# Altium PCB JTAG ICE.PcbDoc
Units mm, origin at the board's own origin, x right, y up, seen from the top; angles counter-clockwise.
Board outline 133 x 101 mm, 2 copper layers (Top Layer, Bottom Layer); 48 components, 49 nets, 240 pads, 22 vias.
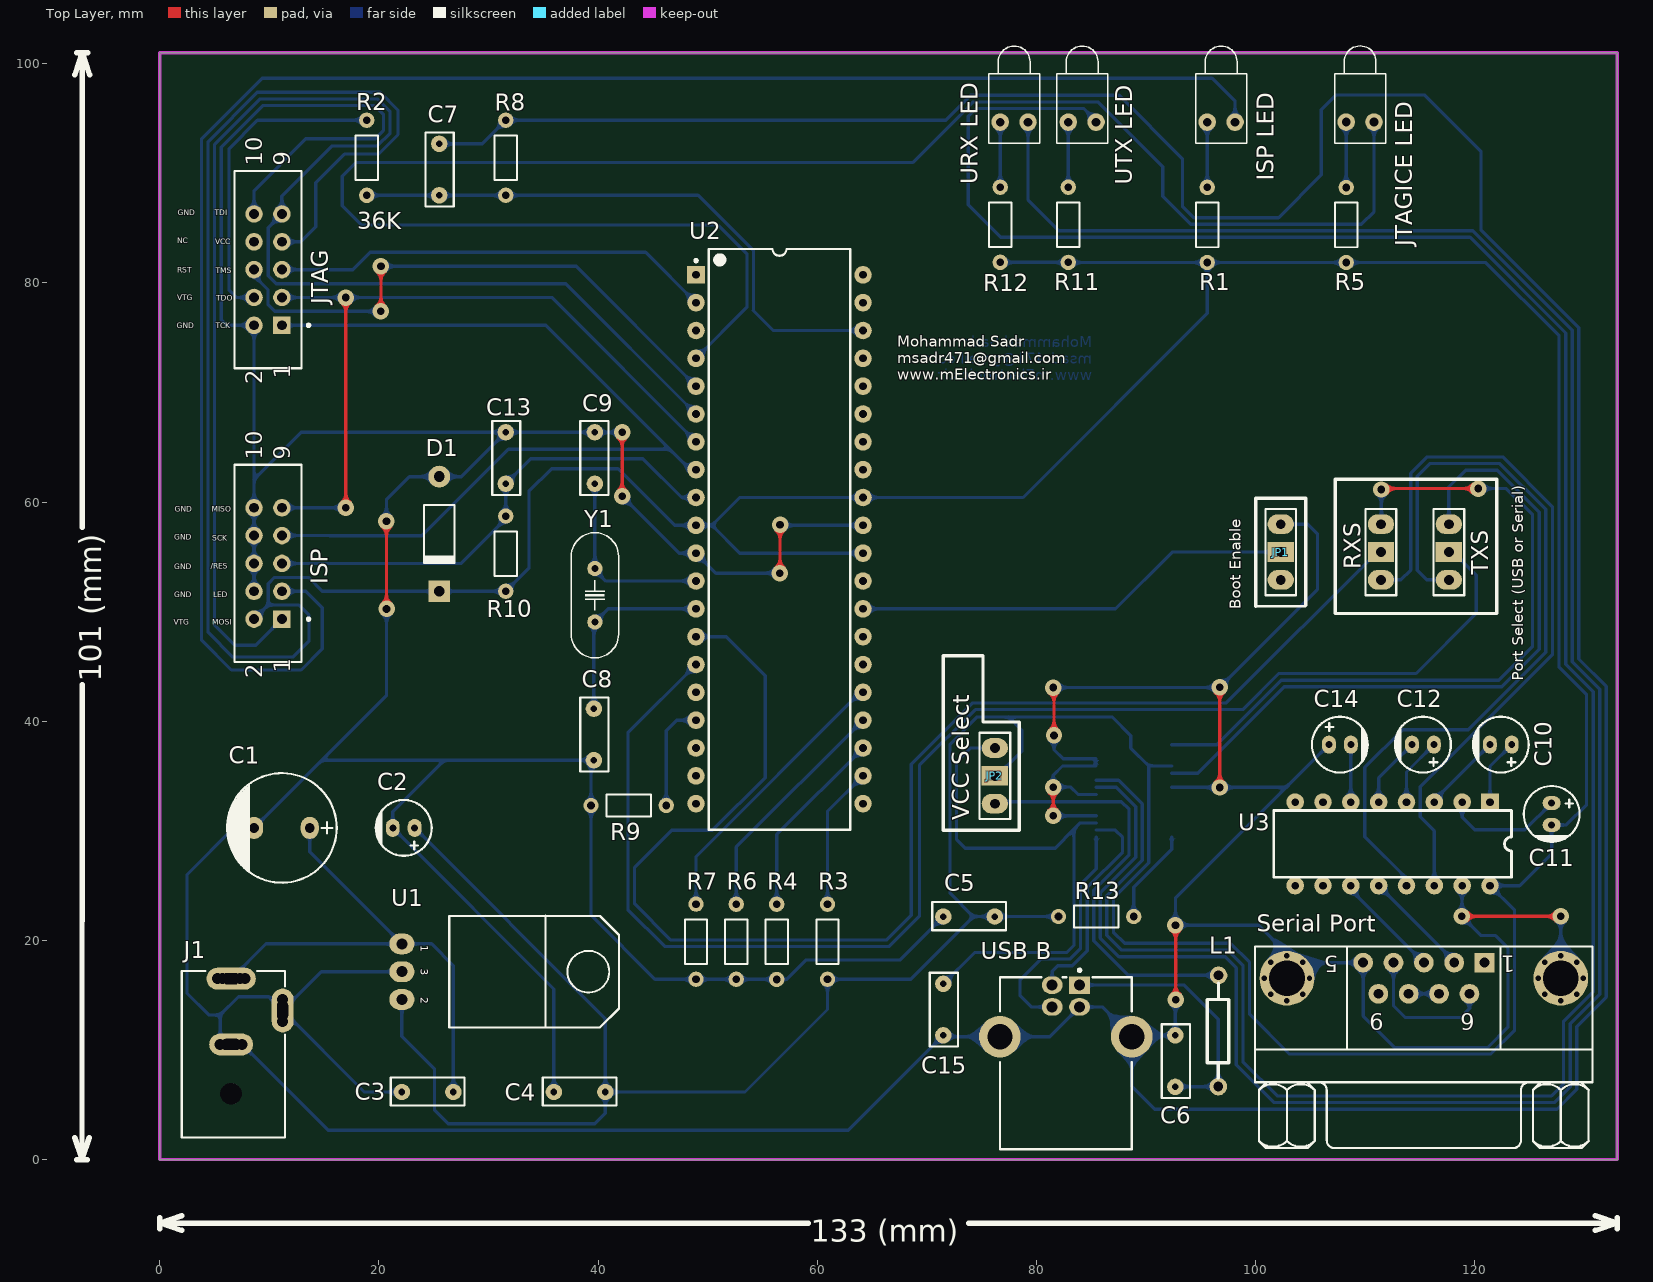
[diagram p0: Top Layer view]
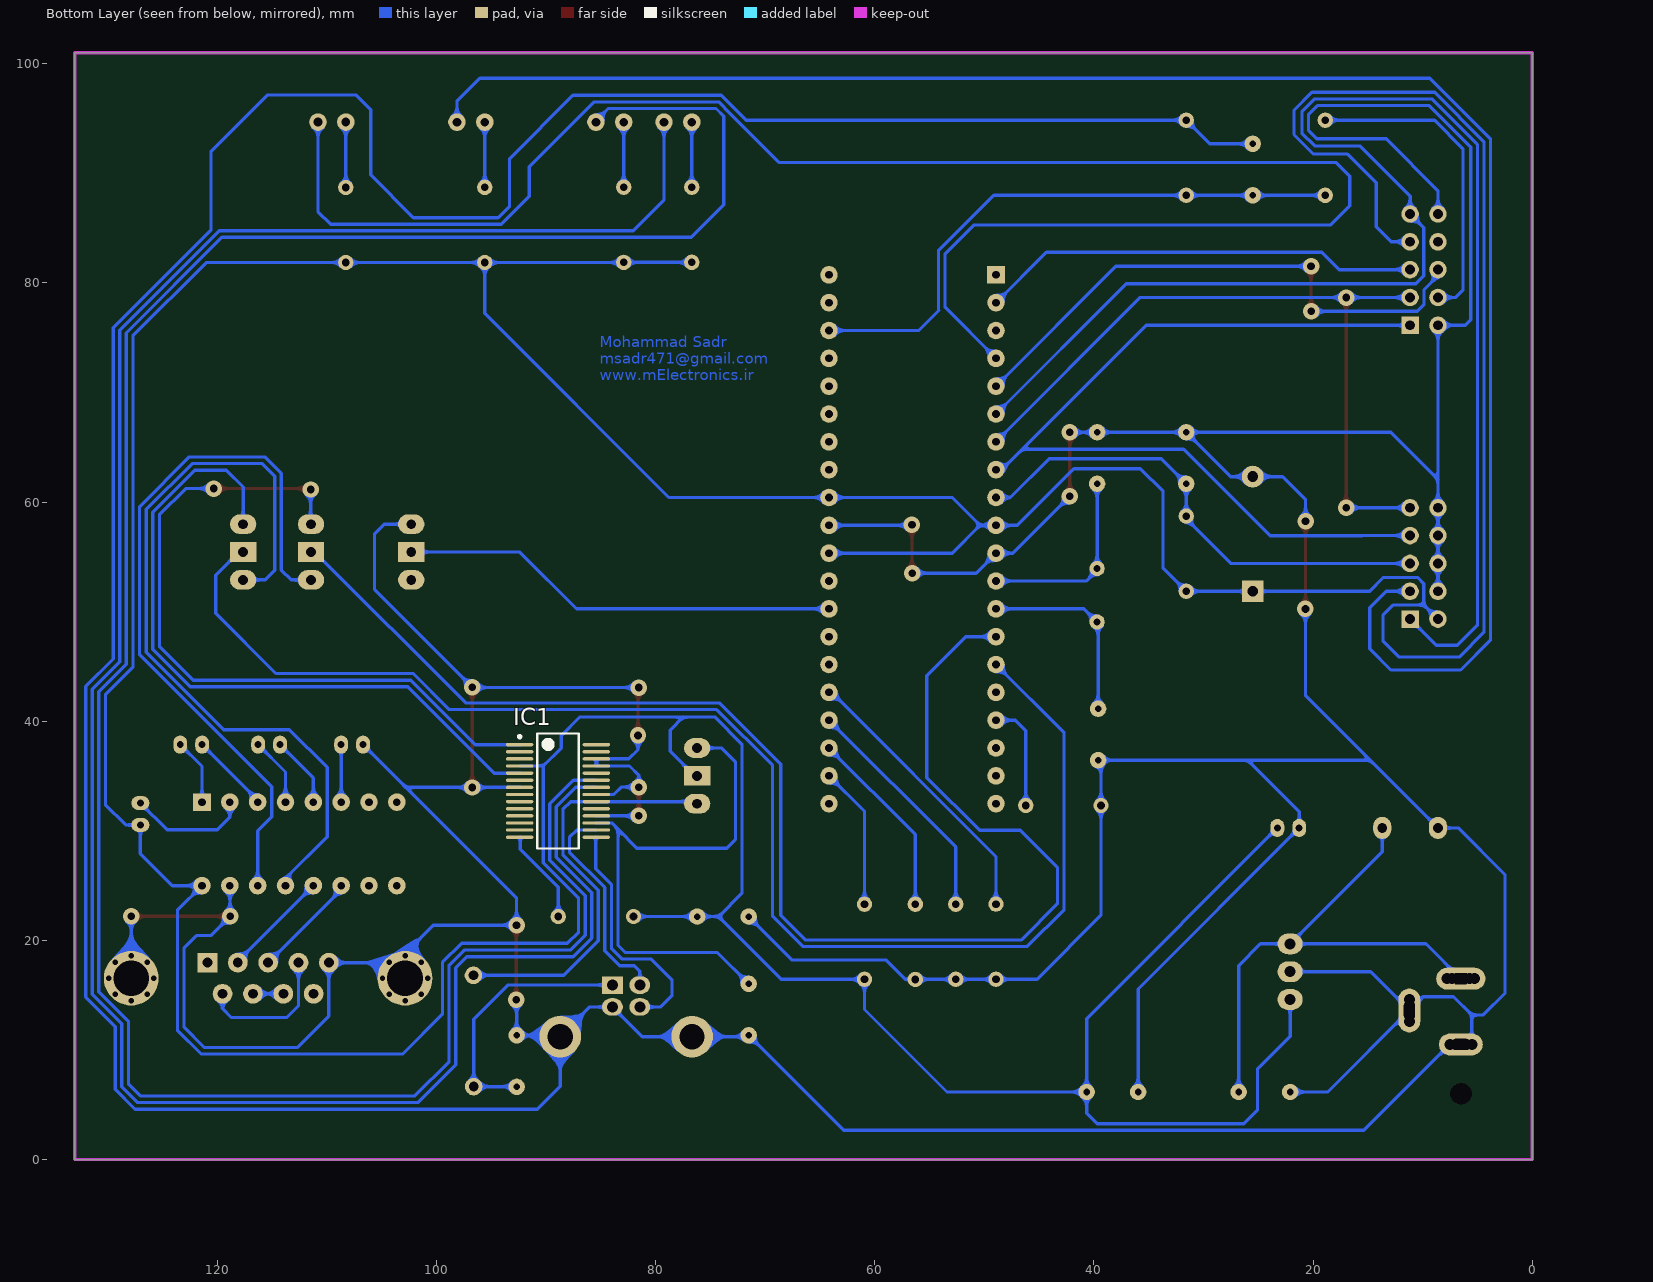
[diagram p1: Bottom Layer view, seen from below]
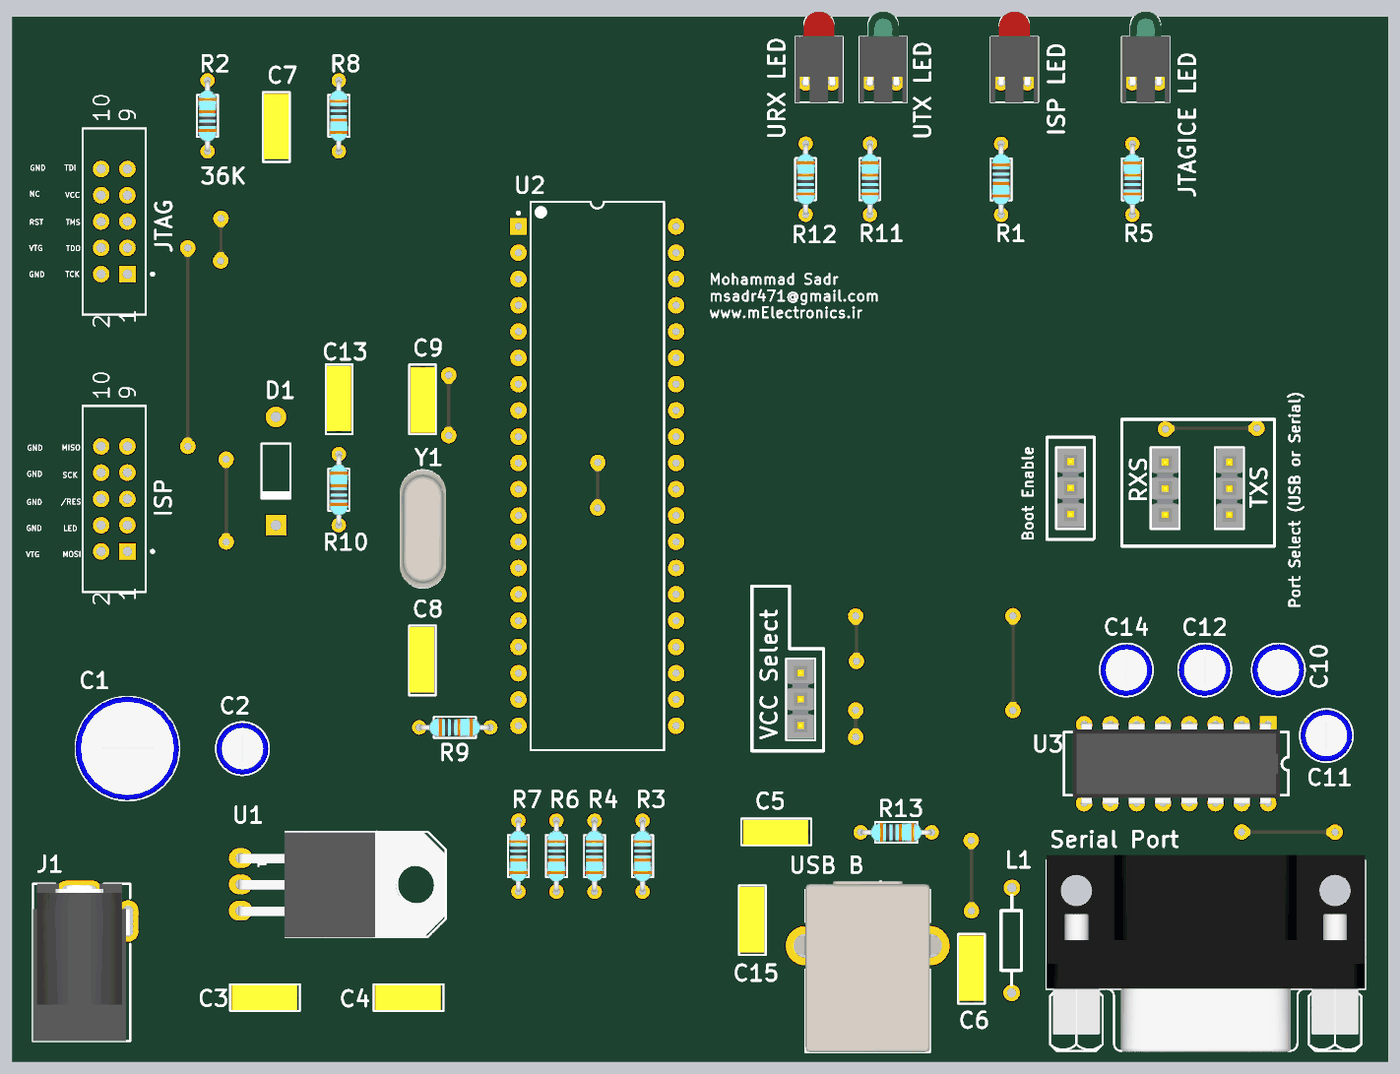
[diagram p2: 3D render of the assembled board from above, using the file's embedded part models]

## Layer stack, top to bottom
Top Solder: solder mask 0.0102, Solder Resist, Dk 3.5
Top Layer: signal copper 0.0356
Dielectric 1: dielectric 0.32, FR-4, Dk 4.8
Bottom Layer: signal copper 0.0356
Bottom Solder: solder mask 0.0102, Solder Resist, Dk 3.5

## Board outline
0,0 0,101 133,101 133,0

## Design rules (kind name [scope] priority, off if disabled: settings)
Clearance [All] p1: gap=0.3 ignorepadtopadclearanceinfootprint=FALSE
ComponentClearance [All] p1: gap=1 collisioncheckmode=3 verticalgap=1 showdistances=FALSE
Height [All] p1: minheight=0 maxheight=100 prefheight=12.7
HoleSize [All] p1: absolutevalues=TRUE maxlimit=5 minlimit=0.01 maxpercent=80.000 minpercent=20.000
HoleToHoleClearance [All] p1: gap=0 allowstackedmicrovias=TRUE
MinimumSolderMaskSliver [All] p1: minsoldermaskwidth=0.1
PlaneClearance [All] p1: clearance=0.5
PlaneConnect [All] p1: planeconnectstyle=Direct reliefexpansion=0.508 reliefentries=4 reliefconductorwidth=0.254 reliefairgap=0.254
PolygonConnect [All] p1: connectstyle=Relief reliefconductorwidth=0.3 reliefentries=4 polygonreliefangle="90 Angle" airgapwidth=0.3
RoutingTopology [All] p1: topology=Horizontal
RoutingVias [All] p1: holewidth=0.7 width=1.5 viastyle="Through Hole" minholewidth=0.7 minwidth=1.5 maxholewidth=0.7 maxwidth=1.5
SMDNeckDown [All] p1: percent=100.000
ShortCircuit [All] p1: allowed=TRUE
SilkToSilkClearance [All] p1: silktosilkclearance=0.1
SilkToSolderMaskClearance [IsPad] p1: minsilkscreentomaskgap=0 clearancetoexposedcopper=TRUE
SolderMaskExpansion [All] p1: expansion=0.1
UnRoutedNet [All] p1: checkbadconnections=TRUE
Width [All] p1: maxlimit=0.5 minlimit=0.3 preferedwidth=0.3 bottomlayer_maxwidth=0.4 minimp=50.000000 maximp=50.000000 favimp=50.000000 checkconnectedcopper=TRUE
18 further rules are at their usual default settings.

## Components (designator, comment, footprint, x,y, rotation, side; value= is the part's Value field where it differs from the comment)
C1 "1000uF" "cap 04" 11.14,30.26 r0 top
C2 "10uF" "cap 01" 22.26,30.26 r0 top
C3 "100nF" "Cap - 100nF - 2" 26.79,6.16 r180 top
C4 "100nF" "Cap - 100nF - 2" 40.66,6.16 r180 top
C5 "100nF" "Cap - 100nF - 2" 76.2,22.17 r180 top
C6 "100nF" "Cap - 100nF - 2" 92.67,6.63 r90 top
C7 "100nF" "Cap - 100nF - 2" 25.495,87.986 r90 top
C8 "22pF" "Cap - 100nF - 2" 39.61,36.44 r90 top
C9 "22pF" "Cap - 100nF - 2" 39.7,66.37 r270 top
C10 "10uF" "cap 01" 122.37,37.86 r0 top
C11 "10uF" "cap 01" 127.01,31.53 r90 top
C12 "10uF" "cap 01" 115.26,37.86 r0 top
C13 "100nF" "Cap - 100nF - 2" 31.57,61.67 r90 top
C14 "10uF" "cap 01" 107.683,37.86 r180 top
C15 "100nF" "Cap - 100nF - 2" 71.5,11.33 r90 top
D1 "Diode 1N4001" DO-41 25.5,57.085 r270 top
IC1 "FT232RL" SSOP-28_M 88.9,33.635 r180 bottom
ISP "IDC 2X5" 9181109621 9.87,54.395 r90 top
"ISP LED" "Red" LED-RED 96.85,94.66 r90 top
J1 "Power Jack" "Power Jack" 6.51,2 r90 top
JP1 "Boot Enable" "jumper selector" 102.293,52.895 r90 top
JP2 "VCC Select" "jumper selector" 76.2,32.47 r90 top
JTAG "IDC 2X5" 9181109621 9.87,81.205 r90 top
"JTAGICE LED" "Green" LED-GREEN 109.53,94.67 r90 top
L1 "Ferrite-bead" Ferrite-bead 96.59,6.65 r270 top
R1 "470R" Res-(1/4)#1 95.58,85.28 r270 top
R2 "36K" Res-(1/4)#2 18.88,91.414 r90 top
R3 "10K" Res-(1/4)#3 60.93,19.87 r270 top
R4 "10K" Res-(1/4)#4 56.29,19.87 r270 top
R5 "100R" Res-(1/4)#5 108.26,85.28 r90 top
R6 "10K" Res-(1/4)#6 52.6,19.87 r270 top
R7 "10K" Res-(1/4)#1 48.93,19.87 r270 top
R8 "150K" Res-(1/4)#7 31.57,91.415 r270 top
R9 "10K" Res-(1/4)#8 42.785,32.31 r0 top
R10 "10K" Res-(1/4)#9 31.569,55.281 r90 top
R11 "470R" Res-(1/4)#10 82.9,85.295 r90 top
R12 "470R" Res-(1/4)#11 76.69,85.295 r90 top
R13 "10K" Res-(1/4)#12 85.44,22.17 r0 top
RXS "RX Port Select" "jumper selector" 111.43,57.975 r270 top
"Serial Port" "DB9 Connector" "DB9 Female" 120.888,17.963 r180 top
TXS "TX Port Select" "jumper selector" 117.63,57.975 r270 top
U1 "L7805CV" "78XXCV - Right" 22.09,17.14 r270 top
U2 "ATmega16A-PU" 40P6 56.55,56.6 r0 top
U3 "MAX232" DIP16 112.493,28.8 r270 top
"URX LED" "Red" LED-RED 77.96,94.66 r90 top
"USB B" "USB Connector" USB2.5-2H4E 82.68,14.92 r270 top
"UTX LED" "Green" LED-GREEN 84.17,94.66 r90 top
Y1 "7.3728 MHz" "XTAL Small" 39.7,51.49 r90 top

## Footprints (in the part's own frame and the unit in brackets; to place one, negate y for a bottom-side part, rotate by r counter-clockwise, add the part's x,y. Pads: shape width x height; smd on the part's side, far side on the other; paste and mask are expansions set on the pad)
40P6 [mm] "DIP, 40-Leads, Row Spacing 15.24mm, Pitch 2.54mm, Body 52.2x13.95mm"
  rect 1.6x1.6 hole 0.7: 1(-7.62,24.13)
  round 1.6 hole 0.7: 2(-7.62,21.59) 3(-7.62,19.05) 4(-7.62,16.51) 5(-7.62,13.97) 6(-7.62,11.43) 7(-7.62,8.89) 8(-7.62,6.35) 9(-7.62,3.81) 10(-7.62,1.27) 11(-7.62,-1.27) 12(-7.62,-3.81) 13(-7.62,-6.35) 14(-7.62,-8.89) 15(-7.62,-11.43) 16(-7.62,-13.97) 17(-7.62,-16.51) 18(-7.62,-19.05) 19(-7.62,-21.59) 20(-7.62,-24.13) 21(7.62,-24.13) 22(7.62,-21.59) 23(7.62,-19.05) 24(7.62,-16.51) 25(7.62,-13.97) 26(7.62,-11.43) 27(7.62,-8.89) 28(7.62,-6.35) 29(7.62,-3.81) 30(7.62,-1.27) 31(7.62,1.27) 32(7.62,3.81) 33(7.62,6.35) 34(7.62,8.89) 35(7.62,11.43) 36(7.62,13.97) 37(7.62,16.51) 38(7.62,19.05) 39(7.62,21.59) 40(7.62,24.13)
  silkscreen extent -7.74,-26.5 6.45,26.5, body extent -7.05,-26.47 7.05,26.47, height 4.83
"78XXCV - Right" [mm] "Right Angle"
  oval 1.905x2.286 hole 1: 1(-2.54,0) 2(2.54,0) 3(0,0)
  silkscreen extent -5.11,4.32 5.08,19.81, body extent -5.03,-0.2 5.13,19.71, height 4.44
9181109621 [mm] "Connector; IDC, PCB Transition - 2 Rows, Thru-Hole; 10 Position; Vertical; Pitch 2.54 mm; Body 18.00 x 6.1 x 7.45 mm (LxWxH)"
  rect 1.6x1.6 hole 0.9: 1(-5.08,-1.27)
  round 1.6 hole 0.9: 2(-5.08,1.27) 3(-2.54,-1.27) 4(-2.54,1.27) 5(0,-1.27) 6(0,1.27) 7(2.54,-1.27) 8(2.54,1.27) 9(5.08,-1.27) 10(5.08,1.27)
  silkscreen extent -9,-3.83 9,3.05
"cap 01" [mm]
  oval 1.27x1.651 hole 0.635: 1(1,0) 2(-1,0)
  silkscreen extent -2.55,-2.55 2.55,2.55, body extent -2.53,-2.53 2.53,2.53, height 12.54
"cap 04" [mil]
  oval 65x80 hole 35: 1(100,0) 2(-100,0)
  silkscreen extent -197,-197 197,197, body extent -198,-197 198,199, height 513
"Cap - 100nF - 2" [mm]
  round 1.5 hole 0.6: 1(0,0) 2(4.7,0)
  silkscreen extent -1.02,-1.33 5.72,1.24, body extent -0.75,-1.2 5.55,1.2, height 6.84
"DB9 Female" [mm] "Connector; D Subminiature AMPLIMITE 2000; 9 Position; Right Angle"
  rect 1.8x1.8 hole 0.9: 1(0,0)
  round 1.8 hole 0.9: 2(2.77,0) 3(5.54,0) 4(8.31,0) 5(11.08,0) 6(1.385,2.84) 7(4.155,2.84) 8(6.925,2.84) 9(9.695,2.84)
  round 0.8 hole 0.5: 10(-9.015,1.42) 10(-8.412,-0.037) 10(-8.412,2.877) 10(-6.955,-0.64) 10(-6.955,3.48) 10(-5.498,-0.037) 10(-5.498,2.877) 10(-4.895,1.42) 11(15.975,1.42) 11(16.578,-0.037) 11(16.578,2.877) 11(18.035,-0.64) 11(18.035,3.48) 11(19.492,-0.037) 11(19.492,2.877) 11(20.095,1.42)
  round 5 hole 3.26: 10(-6.955,1.42) 11(18.035,1.42)
  silkscreen extent -9.86,-1.48 20.94,16.92, body extent -9.87,-2.03 20.95,17.04, height 12.71
DIP16 [mm]
  rect 1.6x1.6 hole 0.7: 1(-3.81,8.89)
  round 1.6 hole 0.7: 2(-3.81,6.35) 3(-3.81,3.81) 4(-3.81,1.27) 5(-3.81,-1.27) 6(-3.81,-3.81) 7(-3.81,-6.35) 8(-3.81,-8.89) 9(3.81,-8.89) 10(3.81,-6.35) 11(3.81,-3.81) 12(3.81,-1.27) 13(3.81,1.27) 14(3.81,3.81) 15(3.81,6.35) 16(3.81,8.89)
  silkscreen extent -3.05,-10.85 3.05,10.85, body extent -3.93,-10 3.94,10, height 5.08
DO-41 [mm] "Diode, Axial; Body 5.2 x 2.7 mm (LxDia. max), Lead Dia. 0.86 mm (max)"
  round 2 hole 1: 1(-5.23,0)
  rect 2x2 hole 1: 2(5.23,0)
  silkscreen extent -2.65,-1.4 2.75,1.4
Ferrite-bead [mm]
  round 1.6 hole 0.9: 1(0,0) 2(-10.16,0.025)
  silkscreen extent -9.45,-1.02 -0.79,0.96
"jumper selector" [mm]
  oval 1.8x2.4 hole 0.9: 1(0,0) 3(5.08,0)
  rect 1.8x2.4 hole 0.9: 2(2.54,0)
  silkscreen extent -1.4,-1.4 6.48,1.4, body extent -1.24,-1.27 6.38,1.27, height 10.16
LED-GREEN [mm] "LED 3mm Right Angle - Color Green"
  round 1.6 hole 0.8: 1(0,1.27) 2(0,-1.27)
  silkscreen extent -1.93,-2.32 6.95,2.3, body extent -1.93,-2.32 6.83,2.3, height 7.31
LED-RED [mm] "LED 3mm Right Angle - Color Red"
  round 1.6 hole 0.8: 1(0,1.27) 2(0,-1.27)
  silkscreen extent -1.93,-2.32 6.95,2.3, body extent -1.93,-2.32 6.83,2.3, height 7.31
"Power Jack" [mm] "Power Adaptor Jack"
  round 1.5 hole 1: 1(14.5,-1.25) 1(14.5,-0.8) 1(14.5,-0.4) 1(14.5,0.4) 1(14.5,0.8) 1(14.5,1.25) 2(8.5,-1) 2(8.5,1) 2(8.5,-0.5) 2(8.5,0.5) 3(10.6,-4.7) 3(11.1,-4.7) 3(12.1,-4.7) 3(12.6,-4.7)
  oval 2x4.5 hole 1 square: 1(14.5,0)
  oval 2x4 hole 1 square: 2(8.5,0)
  oval 4x2 hole 1 square: 3(11.6,-4.7)
  round 1.9 hole 2: MH(4,0)
  silkscreen extent 0,-4.9 15.2,4.5, body extent 0,-4.9 15.2,4.5, height 11
Res-(1/4)#1 [mm]
  round 1.4 hole 0.7: 1(-3.433,0) 2(3.424,0)
  silkscreen extent -2.03,-1.02 2.03,1.02, body extent -3.43,-0.93 3.43,0.91, height 2.92
Res-(1/4)#2 [mm]
  round 1.4 hole 0.7: 1(-3.43,-0.007) 2(3.429,0.002)
  silkscreen extent -2.03,-1.02 2.03,1.02, body extent -3.43,-0.93 3.43,0.91, height 2.92
Res-(1/4)#3 [mm]
  round 1.4 hole 0.7: 1(-3.425,0) 2(3.425,0)
  silkscreen extent -2.03,-1.02 2.03,1.02, body extent -3.43,-0.93 3.43,0.91, height 2.92
Res-(1/4)#4 [mm]
  round 1.4 hole 0.7: 1(-3.425,-0.002) 2(3.436,-0.002)
  silkscreen extent -2.03,-1.02 2.03,1.02, body extent -3.43,-0.93 3.43,0.91, height 2.92
Res-(1/4)#5 [mm]
  round 1.4 hole 0.7: 1(-3.427,0) 2(3.426,0)
  silkscreen extent -2.03,-1.02 2.03,1.02, body extent -3.43,-0.93 3.43,0.91, height 2.92
Res-(1/4)#6 [mm]
  round 1.4 hole 0.7: 1(-3.431,0) 2(3.426,0)
  silkscreen extent -2.03,-1.02 2.03,1.02, body extent -3.43,-0.93 3.43,0.91, height 2.92
Res-(1/4)#7 [mm]
  round 1.4 hole 0.7: 1(-3.428,0) 2(3.429,0)
  silkscreen extent -2.03,-1.02 2.03,1.02, body extent -3.43,-0.93 3.43,0.91, height 2.92
Res-(1/4)#8 [mm]
  round 1.4 hole 0.7: 1(-3.435,0.001) 2(3.424,0.003)
  silkscreen extent -2.03,-1.02 2.03,1.02, body extent -3.43,-0.93 3.43,0.91, height 2.92
Res-(1/4)#9 [mm]
  round 1.4 hole 0.7: 1(-3.426,0.003) 2(3.434,-0.001)
  silkscreen extent -2.03,-1.02 2.03,1.02, body extent -3.43,-0.93 3.43,0.91, height 2.92
Res-(1/4)#10 [mm]
  round 1.4 hole 0.7: 1(-3.429,0.001) 2(3.437,0)
  silkscreen extent -2.03,-1.02 2.03,1.02, body extent -3.43,-0.93 3.43,0.91, height 2.92
Res-(1/4)#11 [mm]
  round 1.4 hole 0.7: 1(-3.425,0) 2(3.435,0.001)
  silkscreen extent -2.03,-1.02 2.03,1.02, body extent -3.43,-0.93 3.43,0.91, height 2.92
Res-(1/4)#12 [mm]
  round 1.4 hole 0.7: 1(-3.435,0) 2(3.428,0.001)
  silkscreen extent -2.03,-1.02 2.03,1.02, body extent -3.43,-0.93 3.43,0.91, height 2.92
SSOP-28_M [mm] "SOP, 28-Leads, Body 10.2x5.3mm, Pitch 0.65mm, IPC Low Density"
  oval 2.5x0.3 smd: 1(-3.5,4.225) 2(-3.5,3.575) 3(-3.5,2.925) 4(-3.5,2.275) 5(-3.5,1.625) 6(-3.5,0.975) 7(-3.5,0.325) 8(-3.5,-0.325) 9(-3.5,-0.975) 10(-3.5,-1.625) 11(-3.5,-2.275) 12(-3.5,-2.925) 13(-3.5,-3.575) 14(-3.5,-4.225) 15(3.5,-4.225) 16(3.5,-3.575) 17(3.5,-2.925) 18(3.5,-2.275) 19(3.5,-1.625) 20(3.5,-0.975) 21(3.5,-0.325) 22(3.5,0.325) 23(3.5,0.975) 24(3.5,1.625) 25(3.5,2.275) 26(3.5,2.925) 27(3.5,3.575) 28(3.5,4.225)
  silkscreen extent -3.63,-5.25 1.9,5.25, body extent -3.88,-5.17 3.88,5.16, height 2.16
USB2.5-2H4E [mm] "Connector; USB1.1, Type B, Thru-Hole; 4 Position; Right Angle"
  rect 1.6x1.9 hole 1: 1(-1,1.25)
  oval 1.6x1.9 hole 1: 2(-1,-1.25) 3(1,-1.25) 4(1,1.25)
  round 3.8 hole 2.3: 5(3.71,6.02) 6(3.71,-6.02)
  silkscreen extent -2.47,-6.02 13.99,6.02, body extent -2.5,-7.45 14,7.45, height 10.95
"XTAL Small" [mil]
  round 55 hole 25: 1(-96.06,0) 2(96.06,0)
  silkscreen extent -225,-85 225,85, body extent -226,-89 226,89, height 140

## Part data
C1: library part Cap-Polar, "Polar Capacitor", Voltage=25V, Adding Date=1387/12/20, Designer="Saeid Jorablo", Organazation=ControTec
C2 C10 C11 C12 C14: library part Cap-Polar, "Polar Capacitor", Voltage=16V, Adding Date=1387/12/20, Designer="Saeid Jorablo", Organazation=ControTec
C3 C4 C5 C6 C7 C8 C9 C13 C15: library part Cap-Bipolar, "Bipolar Capacitor", Voltage=100V, Adding Date=1387/12/20, Designer="Saeid Jorablo", Organazation=ControTec
D1: "1 Amp General Purpose Rectifier", Code_JEDEC=DO-204-AL, ComponentLink1Description="Manufacturer Link", ComponentLink1URL=http://www.fairchildsemi.com/, ComponentLink2Description=Datasheet, ComponentLink2URL=http://www.fairchildsemi.com/ds/1N%2F1N4001.pdf, DatasheetVersion=1998, LatestRevisionDate=17-Jul-2002, LatestRevisionNote="Re-released for DXP Platform.", PackageDescription="Diode, Axial; Body 5.2 x 2.7 mm (LxDia. max), Lead Dia. 0.86 mm (max)", PackageReference=DO-41, PackageVersion=Aug-1999, Published=8-Jun-2000, Publisher="Altium Limited"
IC1: "USB UART Asynchronous Serial Data Transfer Chip, SSOP-28, Tape and Reel", ComponentLink1Description="Manufacturer Link", ComponentLink1URL=http://www.ftdichip.com/Products/ICs/FT232R.htm, ComponentLink2Description=Datasheet, ComponentLink2URL=http://www.ftdichip.com/Support/Documents/DataSheets/ICs/DS_FT232R.pdf, DatasheetVersion="ver 2.07, Jul-2010", PackageDescription="28-Pin Small Outline Package 0.65 mm Pitch", PackageReference=SSOP-28, PackageVersion=2010, Published=19-Aug-2010, Publisher="Altium Limited"
ISP: library part "Header 5X2", "Header, 5-Pin, Dual row", LatestRevisionDate=17-Jul-2002, LatestRevisionNote="Re-released for DXP Platform.", Publisher="Altium Limited"
"ISP LED" "JTAGICE LED" "URX LED" "UTX LED": library part LED, "LED", Adding Date=1387/12/22, Designer="Saeid Jorablo", Organazation=ControTec, Size="SMD 1206"
  "ISP LED" "URX LED": Color=Red
  "JTAGICE LED" "UTX LED": Color=Green
JP1 JP2 RXS TXS: library part "Jumper Selector", "Jumper Selector"
JTAG: library part MHDR2X5, "Header, 5-Pin, Dual row", LatestRevisionDate=17-Jul-2002, LatestRevisionNote="Re-released for DXP Platform.", Publisher="Altium Limited"
R1 R2 R3 R4 R5 R6 R7 R8 R9 R10 R11 R12 R13: library part Resistor, "Resistor", Power="1/4 W", Tolerance=5%
"Serial Port": "Receptacle Assembly, 9 Position, Right Angle", PackageDocument=O, DatasheetDocument=1-Sep-1999, Gender=Receptacle, LatestRevisionDate=17-Jul-2002, LatestRevisionNote="Re-released for DXP Platform.", Orientation="Right Angle", PackageReference=788750, Positions=9, Published=15-Jun-2001, Publisher="Altium Limited"
U1: library part L78XXCV, "Fixed Voltage Regulator", Adding Date=1387/01/06, Company=ControTec, Designer="Saeid Jorablo"
U2: "8-bit AVR Microcontroller, 16KB Flash, 512 Bytes EEPROM, 1KB SRAM, 40-pin PDIP, Industrial Grade (-40°C to 85°C)", Supplier Part Number 1=ATMEGA16A-PU-ND, Code_JEDEC=MS-011-AC, ComponentLink1Description="Manufacturer Link", ComponentLink1URL=http://www.atmel.com/products/avr/default.asp?, ComponentLink2Description="ATmega16A Datasheet", ComponentLink2URL=http://www.atmel.com/dyn/resources/prod_documents/doc8154.pdf, ComponentLink3Description="ATmega16A Summary", ComponentLink3URL=http://www.atmel.com/dyn/resources/prod_documents/8154S.pdf, ComponentLink4Description="Atmel.com Home", ComponentLink4URL=http://www.atmel.com, DatasheetVersion="revB, Jul-2009", PackageDescription="40-lead (0.600\"/15.24mm Wide) Plastic Dual Inline Package (PDIP)", PackageReference=40P6, PackageVersion="revB, Sep-2001", Published=1-Apr-2010, Publisher="Altium Limited", Supplier 1=Digi-Key, Supplier 2=Farnell, Supplier 3=Mouser, Supplier Part Number 2=1704561, Supplier Part Number 3=556-ATMEGA16A-PU
U3: "+5V Powered, Multi-Channel RS-232 Driver/Receiver", ComponentAuthor="Saeid Jorablo", ComponentLink1Description=Datasheet, ComponentLink1URL=http://pdfserv.maxim-ic.com/en/ds/MAX220-MAX249.pdf
"USB B": library part USB, "USB Connector-B Type", Adding Date=10/26/2010, Company="DASE Co", Designer="Eng. Saeid Jorablo"
Y1: library part XTAL, "XTAL Crystal", Company=E.P.I.L, Design Date=11/04/2011
J1: Adding Date=10/21/2009, Company=Personal, Designer="Saeid Jorablo", Project Name=Laser

## Via types
v1: diameter 1.5, hole 0.7, Top Layer to Bottom Layer, 22 vias

## Nets (pads, with @x,y where several pads share a name; then routed paths per layer and width w, separated by ;. In a path a pad name is that pad's centre, name@x,y a point inside that pad or via, vN(x,y) a via of type N, cw(c..) or ccw(c..) an arc to the next point about the centre after c; other vN are vias at no path point)
GND: "Serial Port.5" "Serial Port.10" "Serial Port.11" "USB B.4" "USB B.5" "USB B.6" C1.2 C2.2 C3.2 C4.2 C5.2 C6.2 C7.2 C8.1 C9.1 C13.2 C14.1 C15.1 D1.1 IC1.7 IC1.18 IC1.21 IC1.25 IC1.26 ISP.4 ISP.6 ISP.8 ISP.10 J1.2 J1.3 JP1.3 JTAG.2 JTAG.10 R4.2 R6.2 R7.2 R8.1 R9.1 U1.3 U2.11 U2.31 U3.15 | length 904.6
  Top Layer w0.3: v1(20.682,58.232) 20.682,50.248 v1(20.69,50.24) v1@20.71,50.26 ; v1@42.02,60.69 v1(42.19,60.52) v1(42.19,66.36) ; v1(56.58,53.51) 56.6,53.53 v1(56.6,57.93) ; v1(81.524,33.985) 81.528,33.981 v1(81.528,31.37) ; v1(81.525,43.069) 81.598,42.996 v1(81.598,38.698) ; v1@92.7,20.77 92.68,20.79 v1(92.68,21.39) 92.71,21.36 v1(92.71,14.582) ; v1(96.72,33.95) 96.72,43.093 v1(96.719,43.094) ; v1(118.82,22.2) 118.83,22.19 v1(127.85,22.19)
  Bottom Layer w0.3: J1.2@5.51,10.5 5.51,13.19 ; J1.2@7.01,10.5 J1.2@8.11,10.5 ; J1.2@7.51,10.5 15.35,2.66 62.83,2.66 C15.1 71.62,11.21 76.66,11.21 81.22,11.21 83.93,13.92 85.99,13.92 88.7,11.21 ; ISP.4 ISP.6 ISP.8 ISP.10 8.6,62.07 ; JTAG.10 8.6,88.42 13.32,93.14 19.65,93.14 20.409,93.899 20.409,95.371 19.6,96.18 9.401,96.18 5.6,92.379 5.6,76.63 6.105,76.125 JTAG.2 8.6,62.07 ; v1(20.682,58.232) 20.682,60.221 22.776,62.315 D1.1 27.515,62.315 C13.2 ; v1(20.69,50.24) 20.69,42.35 14.78,36.44 ; C3.2 18.65,6.16 J1.3@11.21,13.6 ; U1.3 14.75,17.14 J1.3@11.21,13.6 ; C7.2 29.413,92.686 R8.1 71.716,94.843 73.983,97.11 87.538,97.11 93.322,91.326 93.322,86.998 94.37,85.95 102.091,85.95 105.99,89.849 105.99,95.813 107.309,97.132 115.438,97.132 120.558,92.012 120.558,84.851 129.49,75.919 129.49,45.673 131.993,43.169 131.993,14.824 129.297,12.128 129.297,6.398 127.499,4.6 90.794,4.6 88.7,6.694 88.7,11.21 ; C4.2 35.96,15.56 C2.2 21.26,31.73 25.97,36.44 ; v1(42.19,60.52) 47.38,55.33 U2.11 50.75,53.51 v1(56.58,53.51) ; v1(42.19,66.36) 39.71,66.36 C9.1 C13.2 ; v1(56.6,57.93) 56.66,57.87 U2.31 ; C5.2 67.529,18.199 58.955,18.199 57.201,16.445 R7.2 45.185,16.445 39.35,22.28 R9.1 39.35,36.18 C8.1 25.97,36.44 ; v1(81.525,43.069) 96.694,43.069 v1(96.719,43.094) 105.638,52.013 105.638,57.096 104.759,57.975 JP1.3 ; v1(81.528,31.37) 81.538,31.36 IC1.18 IC1.18@85.45,31.36 ; v1(81.598,38.698) 81.598,37.403 82.441,36.56 IC1.26 IC1.25 82.373,35.91 81.524,35.061 v1(81.524,33.985) 83.144,33.985 83.819,33.31 IC1.21 IC1.21@85.45,33.31 ; IC1.7@92.35,33.96 IC1.7 102.783,33.96 ; v1(92.71,14.582) 92.67,14.542 C6.2 88.82,11.33 88.7,11.21 ; C14.1 102.783,33.96 ; U3.15 118.82,24.967 v1(118.82,22.2) 120.582,20.438 121.888,20.438 123.022,19.304 123.022,12.051 121.201,10.23 112.667,10.23 109.808,13.089 109.808,17.963 104.273,17.963 102.853,16.543 102.853,18.603 102.853,18.827 100.29,21.39 v1(92.68,21.39) 92.68,23.857 102.783,33.96 ; 127.843,16.543 127.843,18.603 127.843,22.183 v1(127.85,22.19) ; 5.51,13.19 4.45,13.19 2.48,15.16 2.48,25.98 6.76,30.26 C1.2 14.78,36.44 ; 5.51,13.19 7.18,14.86 9.95,14.86 J1.3@11.21,13.6 ; 8.6,62.07 12.9,66.37 C13.2 ; 14.78,36.44 25.97,36.44
LED: "ISP LED.2" ISP.3 | length 166.1
  Bottom Layer w0.3: ISP.3 13.305,51.855 14.82,50.34 14.82,46.6 12.89,44.67 6.54,44.67 3.8,47.41 3.8,93.124 9.336,98.66 96.02,98.66 98.12,96.56 98.12,94.66
MISO: ISP.9 JTAG.3 U2.7 | length 68.3
  Top Layer w0.3: v1(16.975,59.475) v1(16.975,78.655)
  Bottom Layer w0.3: ISP.9 v1(16.975,59.475) ; JTAG.3 v1@16.97,78.665 ; v1@16.97,78.66 v1(16.975,78.655) ; v1@16.975,78.665 35.755,78.665 U2.7
MOSI: ISP.1 JTAG.9 U2.6 | length 136.2
  Bottom Layer w0.3: ISP.1 8.755,46.93 6.82,46.93 5,48.75 5,92.627 9.153,96.78 19.849,96.78 21.009,95.62 21.009,93.65 19.849,92.49 15.74,92.49 11.14,87.89 JTAG.9 9.89,85.035 9.89,80.647 10.622,79.915 37.045,79.915 U2.6
NetC1_1: C1.1 C3.1 J1.1 U1.1 | length 48
  Bottom Layer w0.3: J1.1@6.51,16.5 9.69,19.68 U1.1 ; C1.1 13.68,28.09 U1.1 ; C3.1 26.79,17.69 24.8,19.68 U1.1
NetC6_1: "USB B.1" C6.1 L1.1 | length 24
  Bottom Layer w0.3: 83.93,15.92 93.48,15.92 96.59,12.81 L1.1 92.69,6.65 C6.1
NetC7_1: C7.1 R2.1 R8.2 U2.38 | length 53.6
  Bottom Layer w0.3: R2.1 25.493,87.984 C7.1 R8.2 49.114,87.986 54.18,82.92 54.18,77.511 54.144,77.476 55.97,75.65 U2.38
NetC8_2: C8.2 U2.13 Y1.1 | length 17.7
  Bottom Layer w0.3: C8.2 39.61,48.96 Y1.1 40.9,50.25 U2.13
NetC9_2: C9.2 U2.12 Y1.2 | length 17.5
  Bottom Layer w0.3: C9.2 Y1.2 39.7,53.8 40.71,52.79 U2.12
NetC10_1: C10.1 U3.1 | length 6.1
  Bottom Layer w0.3: U3.1 121.383,35.873 C10.1
NetC10_2: C10.2 U3.3 | length 7.3
  Bottom Layer w0.3: U3.3 116.303,32.793 C10.2
NetC11_1: C11.1 U3.2 | length 11
  Bottom Layer w0.3: U3.2 118.843,31.229 119.982,30.09 124.57,30.09 C11.1
NetC12_1: C12.1 U3.4 | length 6.3
  Bottom Layer w0.3: U3.4 113.763,35.363 C12.1
NetC12_2: C12.2 U3.5 | length 6.5
  Bottom Layer w0.3: U3.5 111.223,34.823 C12.2
NetC14_2: C14.2 U3.6 | length 5.3
  Bottom Layer w0.3: U3.6 C14.2
NetC15_2: C15.2 IC1.17 JP2.3 | length 49.1
  Bottom Layer w0.3: C15.2 74.36,18.89 82.78,18.89 83.42,19.53 83.42,30.13 ; JP2.3 73.946,37.55 72.71,36.314 72.71,29.2 73.5,28.41 81.7,28.41 83.42,30.13 ; IC1.17@85.45,30.71 IC1.17 84,30.71 83.42,30.13
NetIC1_14: IC1.14 R13.2 | length 8.7
  Bottom Layer w0.3: R13.2 88.868,24.834 92.35,28.316 IC1.14@92.35,29.41
NetIC1_15: "USB B.3" IC1.15 | length 22.3
  Bottom Layer w0.3: 81.43,13.92 79.51,13.92 78.5,14.93 78.5,16.42 80.37,18.29 83.029,18.29 84.02,19.281 84.02,25.1 85.45,26.53 IC1.15@85.45,29.41
NetIC1_16: "USB B.2" IC1.16 | length 19.6
  Bottom Layer w0.3: 81.43,15.92 81.43,17.17 81.95,17.69 83.277,17.69 84.62,19.033 84.62,24.829 87.85,28.059 87.85,29.39 87.18,30.06 IC1.16@85.45,30.06
NetIC1_20: IC1.20 JP2.1 L1.2 | length 38.6
  Bottom Layer w0.3: JP2.1 76.39,32.66 IC1.20 87.74,32.66 88.45,31.95 88.45,27.81 85.22,24.58 85.22,19.963 88.373,16.81 L1.2
NetIC1_22: "URX LED.2" IC1.22 | length 205.4
  Bottom Layer w0.3: 79.23,94.66 79.23,87.55 82.03,84.75 119.81,84.75 128.89,75.67 128.89,45.424 131.393,42.921 131.393,15.073 128.697,12.377 128.697,6.647 127.25,5.2 101.7,5.2 98.24,8.66 98.24,17.486 97.216,18.51 87.521,18.51 85.82,20.211 85.82,24.331 89.05,27.561 89.05,32.199 87.289,33.96 IC1.22@85.45,33.96
NetIC1_23: "UTX LED.2" IC1.23 | length 222.5
  Bottom Layer w0.3: 85.44,94.66 85.44,94.77 84.3,95.91 74.48,95.91 73.77,95.2 73.77,87.13 76.75,84.15 119.561,84.15 128.29,75.421 128.29,45.176 130.793,42.672 130.793,15.321 128.097,12.625 128.097,6.896 127.001,5.8 101.949,5.8 98.84,8.909 98.84,17.734 97.464,19.11 87.77,19.11 86.42,20.46 86.42,24.083 89.65,27.313 89.65,32.447 87.487,34.61 IC1.23@85.45,34.61
"NetISP LED_1": "ISP LED.1" R1.1 | length 5.9
  Bottom Layer w0.3: R1.1 95.58,94.66
NetJP1_2: JP1.2 U2.28 | length 40.3
  Bottom Layer w0.3: U2.28 87.21,50.25 92.395,55.435 JP1.2
"NetJTAGICE LED_1": "JTAGICE LED.1" R5.2 | length 6
  Bottom Layer w0.3: R5.2 108.26,94.67
"NetJTAGICE LED_2": "JTAGICE LED.2" U2.4 | length 164.7
  Bottom Layer w0.3: U2.4 53.58,77.76 53.58,82.671 50.976,85.275 18.417,85.275 16.66,87.032 16.66,89.74 17.91,90.99 68.74,90.99 73.17,95.42 73.17,95.449 74.231,96.51 85.6,96.51 91.51,90.6 91.51,87.91 94.07,85.35 109.65,85.35 110.8,86.5 110.8,94.67
NetR3_1: R3.1 U2.22 | length 13.1
  Bottom Layer w0.3: R3.1 60.93,31.77 U2.22
NetR4_1: R4.1 U2.23 | length 17.5
  Bottom Layer w0.3: R4.1 56.288,29.668 U2.23
NetR6_1: R6.1 U2.24 | length 21.6
  Bottom Layer w0.3: R6.1 52.6,28.52 U2.24
NetR7_1: R7.1 U2.25 | length 25.8
  Bottom Layer w0.3: R7.1 48.931,27.638 48.93,27.639 63.921,42.63 U2.25
NetR9_2: R9.2 U2.17 | length 9.9
  Bottom Layer w0.3: R9.2 46.209,39.139 47.16,40.09 U2.17
NetR11_2: "UTX LED.1" R11.2 | length 5.9
  Bottom Layer w0.3: R11.2 82.9,94.66
NetR12_2: "URX LED.1" R12.2 | length 5.9
  Bottom Layer w0.3: R12.2 76.689,94.659 76.69,94.66
"NetSerial Port_2": "Serial Port.2" U3.12 | length 9.9
  Bottom Layer w0.3: U3.12 118.118,18.095 118.118,17.963
"NetSerial Port_3": "Serial Port.3" U3.11 | length 9.8
  Bottom Layer w0.3: U3.11 108.683,24.628 115.348,17.963
"NetSerial Port_4": "Serial Port.4" "Serial Port.6" | length 13.6
  Bottom Layer w0.3: 111.983,17.963 112.578,17.963 112.578,14.016 113.634,12.96 118.71,12.96 119.503,13.753 119.503,15.123
"NetSerial Port_7": "Serial Port.7" "Serial Port.8" | length 2.8
  Bottom Layer w0.3: 113.963,15.123 116.733,15.123
RESET: C13.1 ISP.5 R10.2 U2.9 | length 45.1
  Bottom Layer w0.3: ISP.5 27.502,54.395 31.57,58.463 R10.2 C13.1 33.85,63.95 44.08,63.95 47.62,60.41 U2.9
RXD: RXS.2 U2.14 | length 127.9
  Bottom Layer w0.3: U2.14 51.69,47.71 55.24,44.16 55.24,34.85 50.43,30.04 46.71,30.04 43.32,26.65 43.32,23.32 46.6,20.04 66.323,20.04 68.57,22.287 68.57,36.057 74.177,41.664 97.327,41.664 111.098,55.435 RXS.2
RXD1: RXS.3 U3.14 | length 67.4
  Bottom Layer w0.3: RXS.3 113.245,52.895 114.14,53.79 114.14,62.609 115.641,64.11 122.539,64.11 127.08,59.569 127.08,46.06 115.031,34.011 115.031,31.259 116.303,29.987 U3.14
RXD2: IC1.1 RXS.1 | length 66.9
  Top Layer w0.3: v1(111.47,61.14) 111.48,61.13 111.579,61.229 v1(120.304,61.229)
  Bottom Layer w0.3: IC1.1@92.35,37.86 IC1.1 96.461,37.86 102.341,43.74 122.17,43.74 125.27,46.84 125.27,58.833 122.874,61.229 v1(120.304,61.229) ; RXS.1@111.43,58.267 RXS.1 111.47,58.015 v1(111.47,61.14)
SCK: ISP.7 JTAG.1 U2.8 | length 81.9
  Bottom Layer w0.3: ISP.7 15.475,56.935 15.485,56.925 23.915,56.925 31.812,64.822 46.538,64.822 ; JTAG.1 35.235,76.125 46.538,64.822 ; U2.8 48.41,62.95 46.538,64.822
SS: JTAG.6 U2.5 | length 51.6
  Top Layer w0.3: v1(20.15,77.4) 20.18,77.43 v1(20.18,81.51)
  Bottom Layer w0.3: JTAG.6 8.6,80.656 9.865,79.391 9.865,78.031 10.496,77.4 v1(20.15,77.4) ; v1(20.18,81.51) 37.99,81.51 U2.5
TMS: JTAG.5 U2.2 | length 40.4
  Bottom Layer w0.3: JTAG.5 17.605,81.205 19.19,82.79 44.33,82.79 U2.2
TXD: TXS.2 U2.15 | length 131.3
  Bottom Layer w0.3: U2.15 42.72,38.96 42.72,22.79 46.07,19.44 66.571,19.44 69.32,22.189 69.32,35.959 74.425,41.064 98.817,41.064 102.103,44.35 114.64,44.35 120.13,49.84 120.13,53.32 118.015,55.435 TXS.2
TXD1: TXS.3 U3.13 | length 72
  Bottom Layer w0.3: U3.13 113.763,25.647 109.96,29.45 109.96,35.78 113.41,39.23 119.401,39.23 126.47,46.299 126.47,59.33 122.29,63.51 115.89,63.51 114.74,62.36 114.74,53.76 115.605,52.895 TXS.3
TXD2: IC1.5 TXS.1 | length 64.8
  Bottom Layer w0.3: IC1.5@92.35,35.26 IC1.5 94.71,35.26 102.59,43.14 122.463,43.14 125.87,46.547 125.87,59.081 122.041,62.91 119.17,62.91 117.63,61.37 TXS.1 TXS.1@117.826,57.975
VCC: C2.1 C4.1 C5.1 C11.2 D1.2 IC1.4 ISP.2 JP2.2 JTAG.7 R1.2 R3.2 R5.1 R10.1 R11.1 R12.1 R13.1 U1.2 U2.10 U2.30 U2.32 U3.16 | length 580.3
  Bottom Layer w0.3: ISP.2 9.89,50.605 ; JTAG.7 12.875,83.745 14.24,85.11 14.24,89.14 16.85,91.75 19.957,91.75 21.735,93.528 21.735,95.742 20.097,97.38 8.904,97.38 4.4,92.876 4.4,48.11 6.66,45.85 12.14,45.85 13.621,47.331 13.621,49.649 12.665,50.605 9.89,50.605 ; U1.2 22.09,11.25 25.06,8.28 25.06,4.53 26.33,3.26 39.69,3.26 40.66,4.23 C4.1 ; C2.1 40.66,12.86 C4.1 ; R10.1 D1.2 ; U2.30 52.93,55.33 50.39,57.87 ; JP2.2 76.433,35.01 78.665,37.242 78.665,39.176 77.451,40.39 ; R12.1 82.895,81.87 R11.1 82.912,81.853 R1.2@95.58,81.853 ; R13.1 C5.1 74.24,22.17 ; IC1.4@92.35,35.91 90.23,35.91 ; R1.2 R1.2@95.58,81.853 ; 9.89,50.605 9.89,52.55 10.45,53.11 13.58,53.11 14.835,51.855 D1.2 ; D1.2 31.57,51.855 33.68,53.965 33.68,60.97 35.75,63.04 41.82,63.04 46.99,57.87 U2.10 50.39,57.87 ; C4.1 53.4,6.16 60.93,13.69 R3.2 68.515,16.445 74.24,22.17 ; 50.39,57.87 52.93,60.41 U2.32 78.774,60.41 95.58,77.216 R1.2@95.58,81.853 ; 74.24,22.17 72.11,24.3 72.11,37.9 74.6,40.39 77.451,40.39 ; 77.451,40.39 86.89,40.39 88.59,38.69 88.59,37.55 90.23,35.91 ; 90.23,35.91 90.25,35.89 90.25,27.064 87.02,23.834 87.02,20.75 88.04,19.73 97.693,19.73 99.44,17.983 99.44,13.26 103.07,9.63 121.45,9.63 123.622,11.802 123.622,22.751 U3.16 124.08,24.99 127.01,27.92 C11.2 128.34,30.53 130.193,32.383 130.193,42.424 127.69,44.927 127.69,75.173 121.01,81.853 R5.1 R1.2@95.58,81.853
VTG: JTAG.4 R2.2 | length 29.1
  Bottom Layer w0.3: JTAG.4@8.6,78.659 JTAG.4 6.975,78.665 6.32,79.32 6.32,92.25 8.913,94.843 R2.2
pads on no net: "Serial Port.1" "Serial Port.9" IC1.2 IC1.3 IC1.6 IC1.8 IC1.9 IC1.10 IC1.11 IC1.12 IC1.13 IC1.19 IC1.24 IC1.27 IC1.28 J1.MH JP1.1 JTAG.8 U2.1 U2.3 U2.16 U2.18 U2.19 U2.20 U2.21 U2.26 U2.27 U2.29 U2.33 U2.34 U2.35 U2.36 U2.37 U2.39 U2.40 U3.7 U3.8 U3.9 U3.10

## Keep-outs
Keep-Out Layer:
  the board outline again, w0.3

## Other copper
Bottom Layer:
  text "Mohammad Sadr / msadr471@gmail.com / www.mElectronics.ir" at 85.109,71.123 h1

## Silkscreen, mask and mechanical layers (free items; w line width, h text height)
Top Overlay:
  lines w0.254: 100.016,50.483 104.491,50.483 104.583,50.575
  lines w0.3: 100.016,50.483 100.016,60.355 100.823,60.355 104.583,60.355 104.583,50.575 ; 71.49,30.05 71.49,45.96 75.12,45.96 75.12,39.92 78.43,39.92 78.43,30.05 71.49,30.05 ; 107.26,49.83 107.26,62.08 121.99,62.08 121.99,49.83 107.26,49.83
  lines w0.5: -7.766,2 -7.1,0 ; -7.742,99 -7.075,101 ; -7.6,0 -6.6,0 ; -7.575,101 -6.575,101 ; -7.089,43.324 -7.1,0 ; -7.086,57.676 -7.075,101 ; -6.433,2 -7.1,0 ; -6.409,99 -7.075,101 ; 0,-6.3 0,-5.3 ; 2,-6.467 0,-5.8 ; 2,-5.133 0,-5.8 ; 59.167,-5.8 0,-5.8 ; 73.833,-5.8 133,-5.8 ; 131,-6.467 133,-5.8 ; 131,-5.133 133,-5.8 ; 133,-6.3 133,-5.3
  text "TDI" at 5.009,86.173 h0.5
  text "GND" at 1.65,86.155 h0.5
  text "NC" at 1.613,83.635 h0.5
  text "VCC" at 5.064,83.525 h0.5
  text "RST" at 1.595,80.914 h0.5
  text "TMS" at 5.119,80.896 h0.5
  text "VTG" at 1.577,78.395 h0.5
  text "TDO" at 5.155,78.376 h0.5
  text "TCK" at 5.082,75.875 h0.5
  text "GND" at 1.558,75.857 h0.5
  text "Mohammad Sadr / msadr471@gmail.com / www.mElectronics.ir" at 67.304,71.163 h1
  text "MISO" at 4.732,59.109 h0.5
  text "GND" at 1.373,59.091 h0.5
  text "GND" at 1.336,56.571 h0.5
  text "SCK" at 4.787,56.461 h0.5
  text "/RES" at 4.659,53.889 h0.5
  text "GND" at 1.318,53.85 h0.5
  text "GND" at 1.3,51.331 h0.5
  text "LED" at 4.878,51.312 h0.5
  text "MOSI" at 4.805,48.811 h0.5
  text "VTG" at 1.281,48.793 h0.5
  text "Port Select (USB or Serial)" at 124.431,43.694 h1 r90
  text "101 (mm)" at -5.366,43.577 h2 r89.99
  text "133 (mm)" at 59.421,-7.523 h2

## Text inside footprints (layer, text, board x,y; h text height)
ISP: Top Overlay "2" at 9.35,43.92 h1.5 r90; Top Overlay "1" at 11.89,44.42 h1.5 r90; Top Overlay "10" at 9.35,63.87 h1.5 r90; Top Overlay "9" at 11.89,63.87 h1.5 r90
JTAG: Top Overlay "2" at 9.35,70.73 h1.5 r90; Top Overlay "1" at 11.89,71.23 h1.5 r90; Top Overlay "10" at 9.35,90.68 h1.5 r90; Top Overlay "9" at 11.89,90.68 h1.5 r90
"Serial Port": Top Overlay "1" at 123.682,18.603 h1.5 r180; Top Overlay "5" at 107.553,18.603 h1.5 r180; Top Overlay "9" at 111.688,13.363 h1.5 r180; Top Overlay "6" at 119.988,13.363 h1.5 r180
U1: Top Overlay "1" at 23.79,19.553 h0.7 r270; Top Overlay "2" at 23.79,14.829 h0.7 r270; Top Overlay "3" at 23.79,17.394 h0.7 r270